# Altium PCB Edge_logic_analyzer.PcbDoc (part 3 of 3)
Units mm, origin at the board's own origin, x right, y up, seen from the top; angles counter-clockwise.
Board outline 76.03 x 55 mm, 4 copper layers (L1, L2, L3, L4), stack 1.527 mm thick; 110 components, 90 nets, 430 pads, 763 vias.
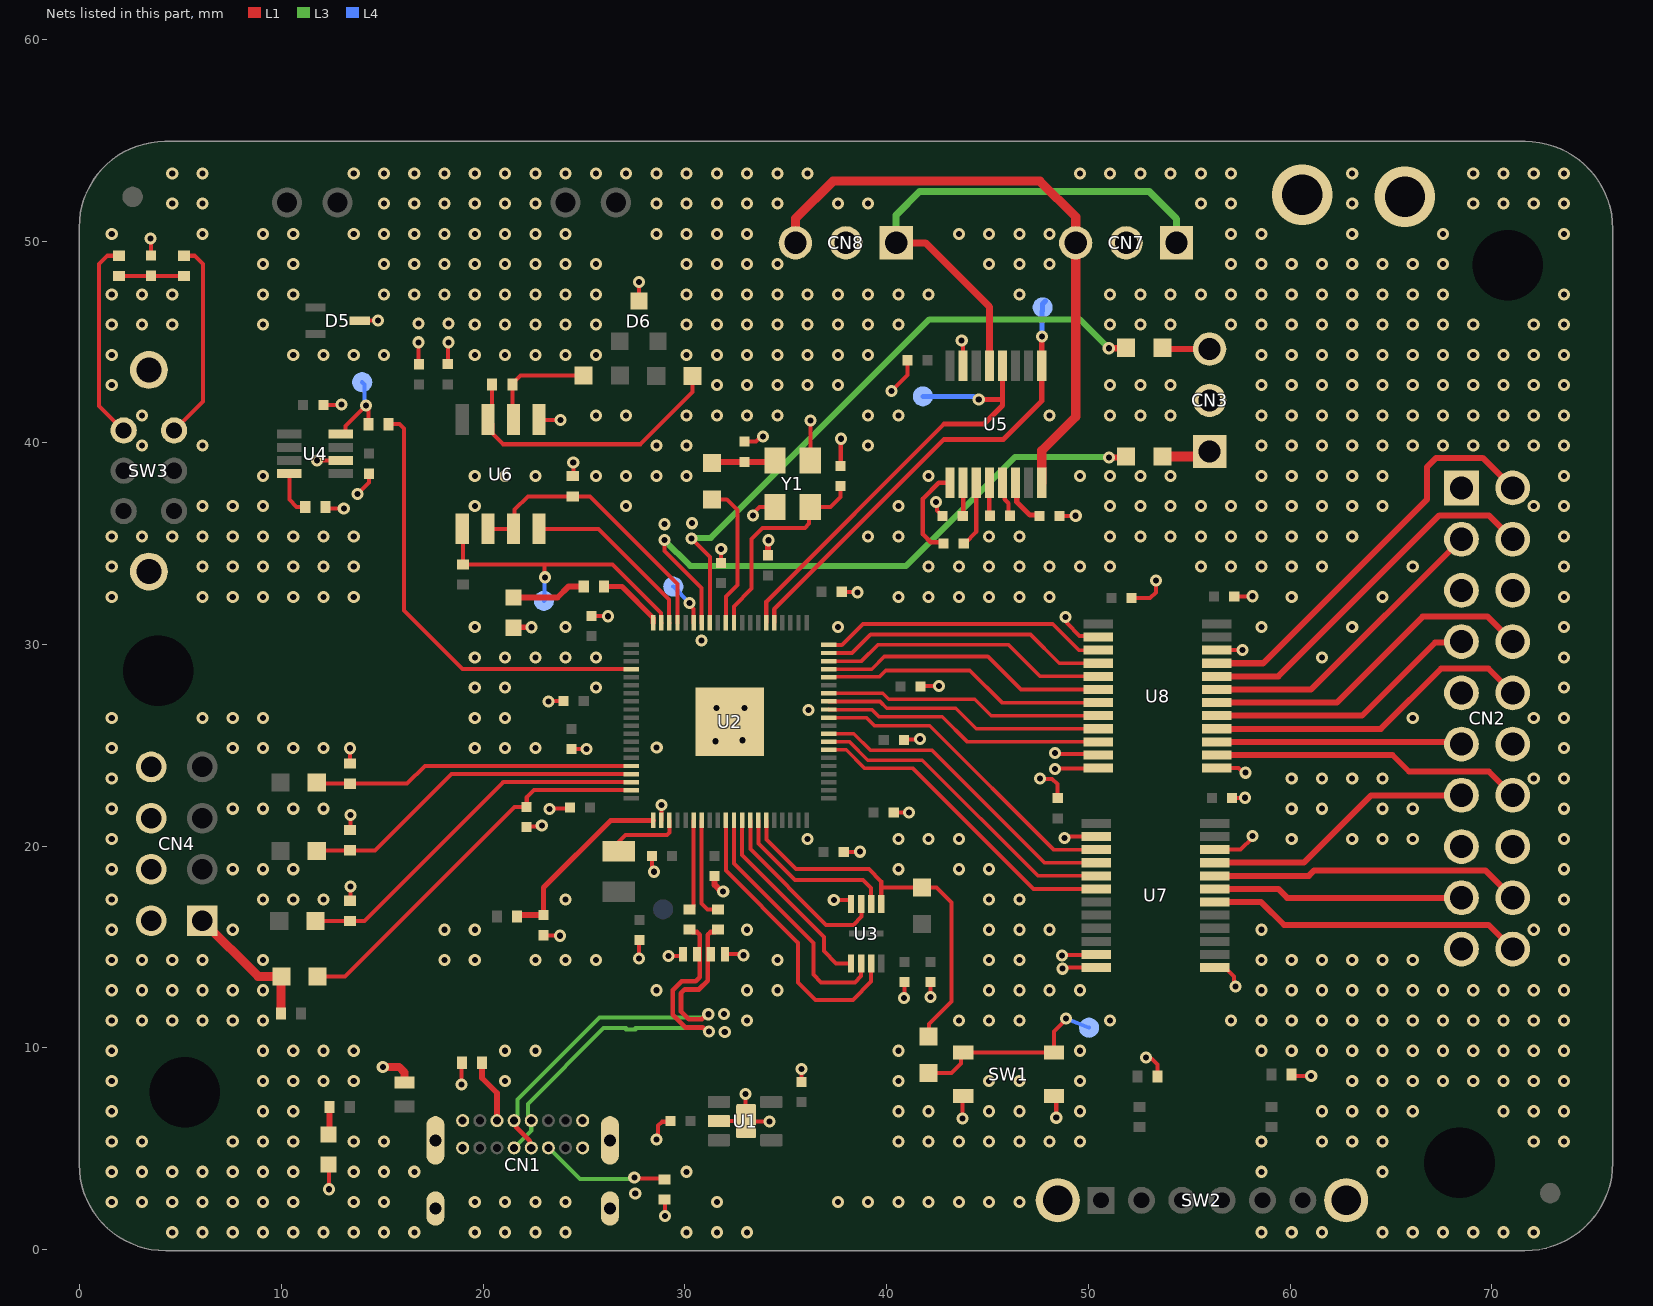
[diagram p4: the nets of this part, all layers, seen from the top]

## Via types
v1: diameter 0.6, hole 0.3, L1 to L4, tented both sides, 761 vias
v2: diameter 3, hole 2, L1 to L4, 2 vias

## Nets (pads, with @x,y where several pads share a name; then routed paths per layer and width w, separated by ;. In a path a pad name is that pad's centre, name@x,y a point inside that pad or via, vN(x,y) a via of type N, cw(c..) or ccw(c..) an arc to the next point about the centre after c; other vN are vias at no path point) (continued)
GND: C1.2 C2.2 C3.2 C4.2 C5.2 C6.1 C7.2 C8.2 C9.2 C10.1 C11.2 C12.2 C13.1 C14.1 C15.1 C16.1 C17.2 C18.1 C19.1 C20.1 C21.1 C22.2 C23.2 C24.2 C25.1 C26.1 C29.1 C30.1 C31.1 C32.1 C33.1 C34.1 C35.1 C36.1 CN1.A1 CN1.A12 CN1.B1 CN1.B12 CN1.S1 CN1.S2 CN1.S3 CN1.S4 CN2.1 CN2.5 CN2.6 CN2.9 CN2.12 CN2.15 CN2.16 CN2.19 CN3.2 CN4.2 CN4.4 CN4.6 CN4.8 CN7.2 CN8.2 D1.2 D2.1 D3.1 D4.2 D5.3 D6.3 D7.2 R1.1 R2.2 R14.1 R15.2 R23.1 R25.1 R27.1 R29.2 R32.1 SW1.1 SW1.2 SW2.7 SW2.8 SW3.MH1 SW3.MH2 U1.2 U2.62 U2.81 U3.4 U4.2 U5.15 U6.5 U7.2 U7.11 U7.12 U7.13 U7.22 U8.2 U8.11 U8.12 U8.13 U8.22 Y1.2 Y1.4 | length 81.6
  L1 w0.2: v1(3.509,50.122) 3.521,50.11 3.521,49.29 C24.2@3.534,49.278 ; v1(11.759,39.124) U4.2@12.939,39.124 ; C22.2@12.076,41.87 12.981,41.87 v1(12.981,41.894) ; R25.1@12.176,36.812 12.255,36.734 v1(13.088,36.734) ; D4.2@12.338,4.21 12.352,4.197 v1(12.352,2.99) ; R32.1@13.392,17.296 13.427,17.331 v1(13.427,18.001) ; R14.1@13.392,20.796 13.417,20.82 v1(13.417,21.535) ; R15.2@13.392,24.096 13.401,24.105 v1(13.401,24.855) ; v1(13.769,37.464) 14.337,38.032 C23.2@14.337,38.465 ; D5.3@13.878,46.049 13.885,46.056 14.784,46.056 v1(14.79,46.063) ; v1@16.751,44.987 16.782,44.957 16.782,43.922 C31.1@16.812,43.891 ; C30.1@18.245,43.896 18.265,43.916 18.265,44.961 v1(18.285,44.981) ; v1(18.922,8.183) 18.931,8.193 18.931,9.253 R2.2@18.941,9.263 ; D7.2@21.504,30.827 D7.2@21.53,30.854 ; C17.2@22.153,20.943 22.191,20.981 22.867,20.981 v1(22.905,21.02) ; U6.5@22.773,41.155 22.806,41.122 v1(23.838,41.122) ; C12.2@22.99,15.585 23.003,15.572 23.801,15.572 v1(23.814,15.558) ; v1(23.244,27.177) 23.259,27.191 23.97,27.191 C8.2@23.985,27.206 ; v1(23.295,21.835) 23.339,21.878 24.26,21.878 C9.2@24.303,21.922 ; C36.1@24.376,24.812 24.382,24.818 25.122,24.818 v1(25.127,24.823) ; R23.1@24.438,38.342 24.466,38.37 v1(24.466,39.015) ; C7.2@25.376,31.412 25.383,31.405 26.184,31.405 v1(26.191,31.399) ; D6.3@27.717,47.032 27.725,47.04 v1(27.725,47.971) ; v1(27.721,14.427) 27.73,14.437 27.73,15.435 C13.1@27.721,15.445 ; C14.1@28.365,19.519 28.365,18.945 28.47,18.84 v1(28.47,18.732) ; v1(28.598,5.466) 28.675,5.543 28.675,6.157 28.855,6.337 29.255,6.337 C1.2@29.288,6.369 ; U2.62@28.833,21.278 28.841,21.286 28.841,22.03 v1(28.849,22.038) ; R1.1@28.992,2.481 29.011,2.462 v1(29.011,1.662) ; v1(29.178,14.552) 29.802,14.552 D3.1@29.85,14.6 ; U1.2@31.683,6.371 U1.2@33.033,6.371 ; C16.1@31.796,34.048 C16.1@31.796,34.048 31.798,34.734 v1(31.8,34.736) ; D2.1@31.983,14.644 32.849,14.644 v1(32.902,14.591) ; C19.1@32.96,40.056 32.977,40.073 33.522,40.073 33.759,40.31 v1(33.867,40.31) ; v1(33.004,7.709) 33.004,6.4 U1.2@33.033,6.371 ; v1(33.379,36.391) 33.456,36.467 33.456,36.578 33.696,36.818 Y1.4@34.461,36.818 ; C6.1@34.112,34.422 C6.1@34.127,34.437 ; v1@34.127,35.151 v1(34.141,35.166) ; v1(34.202,6.344) 33.06,6.344 U1.2@33.033,6.371 ; v1(35.774,8.952) 35.775,8.951 35.775,8.313 C2.2@35.776,8.312 ; Y1.2@36.211,39.118 36.22,39.128 v1(36.22,41.098) ; v1(37.382,17.331) 38.174,17.331 38.234,17.271 U3.4@38.234,17.136 ; C18.1@37.716,38.856 37.726,38.867 37.726,40.188 v1(37.737,40.198) ; C4.2@37.776,32.612 37.789,32.599 38.547,32.599 v1(38.559,32.586) ; C10.1@37.876,19.712 37.883,19.719 38.682,19.719 v1(38.689,19.725) ; v1(40.245,42.562) 41.034,43.351 41.034,44.082 C29.1@41.027,44.089 ; C3.2@40.354,21.663 v1(41.117,21.663) ; C15.1@40.858,25.269 40.883,25.294 41.633,25.294 v1(41.658,25.319) ; v1(40.871,12.465) 40.878,12.472 40.878,13.255 C20.1@40.884,13.261 ; C5.2@41.681,27.91 41.701,27.93 42.582,27.93 v1(42.601,27.949) ; v1(42.177,12.523) 42.18,12.527 42.18,13.258 C21.1@42.184,13.261 ; v1(42.457,37.066) 42.489,37.035 42.489,36.649 C26.1@42.776,36.362 ; v1(43.724,45.062) 43.793,44.994 U5.15@43.793,43.811 ; v1(43.753,6.491) 43.753,7.571 SW1.2@43.797,7.615 ; v1(47.605,23.358) 47.626,23.337 48.205,23.337 48.463,23.079 48.463,22.405 C32.1@48.487,22.381 ; SW1.1@48.297,7.615 48.41,7.502 v1(48.41,6.537) ; v1(48.344,23.828) 48.365,23.849 50.474,23.849 U8.12@50.495,23.869 ; v1(48.351,24.616) 48.4,24.568 50.446,24.568 U8.11@50.495,24.519 ; C25.1@48.576,36.362 48.585,36.371 49.367,36.371 v1(49.376,36.38) ; v1(48.694,14.572) 48.723,14.601 50.366,14.601 U7.11@50.395,14.629 ; v1(48.718,13.925) 48.772,13.979 U7.12@50.395,13.979 ; v1(48.825,20.401) 48.934,20.401 49.012,20.479 U7.2@50.395,20.479 ; v1(48.861,31.354) 48.938,31.277 48.938,31.064 49.574,30.427 50.437,30.427 U8.2@50.495,30.369 ; C35.1@52.147,32.295 53.066,32.295 53.349,32.579 53.349,33.173 v1(53.355,33.179) ; v1(52.853,9.523) 52.93,9.446 53.158,9.446 53.433,9.171 R29.2@53.433,8.571 ; U7.13@56.271,13.979 56.783,13.979 57.223,13.54 57.223,13.126 v1(57.299,13.05) ; U7.22@56.271,19.829 57.55,19.829 58.135,20.414 v1(58.135,20.498) ; U8.13@56.371,23.869 57.457,23.869 57.684,23.642 v1(57.792,23.642) ; U8.22@56.371,29.719 U8.22@56.371,29.719 57.652,29.718 v1(57.654,29.716) ; C33.1@57.126,22.393 57.129,22.397 57.772,22.397 v1(57.776,22.401) ; C34.1@57.234,32.388 57.235,32.389 v1@58.132,32.389 ; R27.1@60.083,8.671 60.155,8.599 v1(61.051,8.599) ; v1@58.132,32.389 v1(58.133,32.389)
  L1 w0.254: D7.2@21.53,30.854 v1(22.391,30.854)
  L1 w0.3: C11.2@31.476,18.512 31.476,18.079 31.807,17.749 v1(31.899,17.749) ; C6.1@34.127,34.437 v1@34.127,35.151
  L1 w0.4: v1(15.023,9.043) 15.835,9.043 16.098,8.78 D1.2@16.098,8.287
  other v1: 4.584,0.857 6.084,0.857 7.584,0.857 9.084,0.857 10.584,0.857 12.084,0.857 13.584,0.857 15.084,0.857 16.584,0.857 19.584,0.857 21.084,0.857 22.584,0.857 24.084,0.857 30.084,0.857 31.584,0.857 33.084,0.857 58.584,0.857 60.084,0.857 61.584,0.857 64.584,0.857 66.084,0.857 67.584,0.857 69.084,0.857 70.584,0.857 72.084,0.857 1.584,2.357 3.084,2.357 4.584,2.357 6.084,2.357 7.584,2.357 9.084,2.357 10.584,2.357 13.584,2.357 15.084,2.357 19.584,2.357 21.084,2.357 22.584,2.357 24.084,2.357 31.584,2.357 37.584,2.357 39.084,2.357 40.584,2.357 42.084,2.357 43.584,2.357 45.084,2.357 46.584,2.357 27.537,2.783 1.584,3.857 3.084,3.857 4.584,3.857 6.084,3.857 7.584,3.857 9.084,3.857 10.584,3.857 13.584,3.857 15.084,3.857 16.584,3.857 30.084,3.857 58.584,3.857 64.584,3.857 1.584,5.357 3.084,5.357 7.584,5.357 9.084,5.357 10.584,5.357 13.584,5.357 15.084,5.357 40.584,5.357 42.084,5.357 43.584,5.357 45.084,5.357 46.584,5.357 48.084,5.357 49.584,5.357 58.584,5.357 61.584,5.357 63.084,5.357 64.584,5.357 72.084,5.357 73.584,5.357 1.584,6.857 9.084,6.857 10.584,6.857 40.584,6.857 42.084,6.857 45.084,6.857 46.584,6.857 49.584,6.857 61.584,6.857 63.084,6.857 64.584,6.857 66.084,6.857 70.584,6.857 72.084,6.857 73.584,6.857 1.584,8.357 9.084,8.357 10.584,8.357 12.084,8.357 13.584,8.357 21.084,8.357 40.584,8.357 45.084,8.357 46.584,8.357 49.584,8.357 63.084,8.357 64.584,8.357 66.084,8.357 67.584,8.357 69.084,8.357 70.584,8.357 72.084,8.357 73.584,8.357 1.584,9.857 9.084,9.857 10.584,9.857 12.084,9.857 13.584,9.857 21.084,9.857 22.584,9.857 40.584,9.857 49.584,9.857 58.584,9.857 60.084,9.857 61.584,9.857 63.084,9.857 64.584,9.857 66.084,9.857 67.584,9.857 69.084,9.857 70.584,9.857 72.084,9.857 73.584,9.857 31.974,10.793 1.584,11.357 3.084,11.357 4.584,11.357 6.084,11.357 7.584,11.357 9.084,11.357 33.084,11.357 43.584,11.357 45.084,11.357 46.584,11.357 51.084,11.357 57.084,11.357 58.584,11.357 60.084,11.357 61.584,11.357 63.084,11.357 64.584,11.357 66.084,11.357 67.584,11.357 69.084,11.357 70.584,11.357 72.084,11.357 73.584,11.357 31.934,11.675 1.584,12.857 3.084,12.857 4.584,12.857 6.084,12.857 7.584,12.857 9.084,12.857 28.584,12.857 33.084,12.857 34.584,12.857 45.084,12.857 46.584,12.857 48.084,12.857 49.584,12.857 58.584,12.857 60.084,12.857 61.584,12.857 63.084,12.857 64.584,12.857 66.084,12.857 67.584,12.857 69.084,12.857 70.584,12.857 72.084,12.857 73.584,12.857 1.584,14.357 3.084,14.357 4.584,14.357 6.084,14.357 9.084,14.357 18.084,14.357 19.584,14.357 22.584,14.357 24.084,14.357 25.584,14.357 34.584,14.357 45.084,14.357 46.584,14.357 58.584,14.357 60.084,14.357 61.584,14.357 63.084,14.357 64.584,14.357 66.084,14.357 73.584,14.357 1.584,15.857 7.584,15.857 18.084,15.857 19.584,15.857 33.084,15.857 45.084,15.857 46.584,15.857 48.084,15.857 58.584,15.857 72.084,15.857 73.584,15.857 1.584,17.357 9.084,17.357 10.584,17.357 12.084,17.357 24.084,17.357 45.084,17.357 46.584,17.357 73.584,17.357 1.584,18.857 7.584,18.857 9.084,18.857 10.584,18.857 40.584,18.857 43.584,18.857 45.084,18.857 73.584,18.857 1.584,20.357 36.084,20.357 40.584,20.357 42.084,20.357 43.584,20.357 60.084,20.357 63.084,20.357 64.584,20.357 66.084,20.357 73.584,20.357 1.584,21.857 7.584,21.857 9.084,21.857 10.584,21.857 12.084,21.857 60.084,21.857 61.584,21.857 64.584,21.857 66.084,21.857 73.584,21.857 1.584,23.357 60.084,23.357 61.584,23.357 63.084,23.357 64.584,23.357 72.084,23.357 73.584,23.357 1.584,24.857 7.584,24.857 9.084,24.857 10.584,24.857 12.084,24.857 19.584,24.857 21.084,24.857 22.584,24.857 73.584,24.857 28.603,24.887 31.521,25.203 32.852,25.251 1.584,26.357 6.084,26.357 7.584,26.357 9.084,26.357 19.584,26.357 21.084,26.357 66.084,26.357 72.084,26.357 73.584,26.357 36.122,26.752 31.568,26.839 32.954,26.839 19.584,27.857 21.084,27.857 25.584,27.857 73.584,27.857 19.584,29.357 21.084,29.357 22.584,29.357 24.084,29.357 25.584,29.357 61.584,29.357 73.584,29.357 30.823,30.198 19.584,30.857 24.084,30.857 37.584,30.857 58.584,30.857 63.084,30.857 73.584,30.857 1.584,32.357 6.084,32.357 7.584,32.357 9.084,32.357 10.584,32.357 12.084,32.357 13.584,32.357 40.584,32.357 42.084,32.357 43.584,32.357 45.084,32.357 46.584,32.357 48.084,32.357 60.084,32.357 64.584,32.357 73.584,32.357 1.584,33.857 6.084,33.857 7.584,33.857 9.084,33.857 10.584,33.857 12.084,33.857 13.584,33.857 42.084,33.857 43.584,33.857 45.084,33.857 46.584,33.857 48.084,33.857 49.584,33.857 51.084,33.857 55.584,33.857 57.084,33.857 58.584,33.857 60.084,33.857 61.584,33.857 66.084,33.857 73.584,33.857 1.584,35.357 3.084,35.357 4.584,35.357 6.084,35.357 7.584,35.357 9.084,35.357 10.584,35.357 12.084,35.357 13.584,35.357 39.084,35.357 40.584,35.357 45.084,35.357 46.584,35.357 51.084,35.357 52.584,35.357 54.084,35.357 55.584,35.357 57.084,35.357 58.584,35.357 60.084,35.357 61.584,35.357 63.084,35.357 73.584,35.357 28.992,35.961 30.354,36.011 6.084,36.857 7.584,36.857 9.084,36.857 19.584,36.857 27.084,36.857 40.584,36.857 51.084,36.857 52.584,36.857 54.084,36.857 55.584,36.857 57.084,36.857 58.584,36.857 60.084,36.857 61.584,36.857 63.084,36.857 64.584,36.857 72.084,36.857 73.584,36.857 9.084,38.357 19.584,38.357 21.084,38.357 22.584,38.357 25.584,38.357 27.084,38.357 28.584,38.357 30.084,38.357 42.084,38.357 49.584,38.357 51.084,38.357 52.584,38.357 54.084,38.357 58.584,38.357 60.084,38.357 61.584,38.357 63.084,38.357 64.584,38.357 73.584,38.357 3.084,39.857 6.084,39.857 28.584,39.857 30.084,39.857 39.084,39.857 58.584,39.857 60.084,39.857 61.584,39.857 63.084,39.857 64.584,39.857 66.084,39.857 67.584,39.857 69.084,39.857 70.584,39.857 72.084,39.857 73.584,39.857 3.084,41.357 25.584,41.357 27.084,41.357 30.084,41.357 31.584,41.357 33.084,41.357 34.584,41.357 39.084,41.357 40.584,41.357 48.084,41.357 51.084,41.357 52.584,41.357 54.084,41.357 58.584,41.357 60.084,41.357 61.584,41.357 63.084,41.357 64.584,41.357 66.084,41.357 67.584,41.357 69.084,41.357 70.584,41.357 72.084,41.357 73.584,41.357 1.584,42.857 31.584,42.857 33.084,42.857 34.584,42.857 36.084,42.857 37.584,42.857 51.084,42.857 52.584,42.857 54.084,42.857 58.584,42.857 60.084,42.857 61.584,42.857 63.084,42.857 64.584,42.857 66.084,42.857 67.584,42.857 69.084,42.857 70.584,42.857 72.084,42.857 73.584,42.857 1.584,44.357 10.584,44.357 12.084,44.357 13.584,44.357 15.084,44.357 19.584,44.357 21.084,44.357 22.584,44.357 24.084,44.357 25.584,44.357 30.084,44.357 31.584,44.357 33.084,44.357 34.584,44.357 36.084,44.357 37.584,44.357 39.084,44.357 58.584,44.357 60.084,44.357 61.584,44.357 63.084,44.357 64.584,44.357 66.084,44.357 67.584,44.357 69.084,44.357 70.584,44.357 72.084,44.357 73.584,44.357 16.801,44.981 1.584,45.857 3.084,45.857 4.584,45.857 9.084,45.857 19.584,45.857 21.084,45.857 22.584,45.857 24.084,45.857 25.584,45.857 30.084,45.857 31.584,45.857 33.084,45.857 34.584,45.857 36.084,45.857 37.584,45.857 39.084,45.857 40.584,45.857 51.084,45.857 52.584,45.857 54.084,45.857 57.084,45.857 58.584,45.857 60.084,45.857 61.584,45.857 63.084,45.857 64.584,45.857 66.084,45.857 67.584,45.857 69.084,45.857 72.084,45.857 73.584,45.857 16.801,45.921 18.285,45.921 1.584,47.357 3.084,47.357 4.584,47.357 9.084,47.357 10.584,47.357 15.084,47.357 16.584,47.357 18.084,47.357 19.584,47.357 21.084,47.357 22.584,47.357 24.084,47.357 25.584,47.357 30.084,47.357 31.584,47.357 33.084,47.357 34.584,47.357 36.084,47.357 37.584,47.357 39.084,47.357 40.584,47.357 42.084,47.357 46.584,47.357 51.084,47.357 52.584,47.357 54.084,47.357 55.584,47.357 57.084,47.357 58.584,47.357 60.084,47.357 61.584,47.357 63.084,47.357 64.584,47.357 66.084,47.357 67.584,47.357 73.584,47.357 9.084,48.857 10.584,48.857 15.084,48.857 16.584,48.857 18.084,48.857 19.584,48.857 21.084,48.857 22.584,48.857 24.084,48.857 25.584,48.857 30.084,48.857 31.584,48.857 33.084,48.857 34.584,48.857 45.084,48.857 46.584,48.857 48.084,48.857 57.084,48.857 58.584,48.857 60.084,48.857 61.584,48.857 63.084,48.857 64.584,48.857 66.084,48.857 67.584,48.857 1.584,50.357 6.084,50.357 9.084,50.357 10.584,50.357 13.584,50.357 15.084,50.357 16.584,50.357 18.084,50.357 19.584,50.357 21.084,50.357 22.584,50.357 24.084,50.357 28.584,50.357 30.084,50.357 31.584,50.357 33.084,50.357 43.584,50.357 45.084,50.357 46.584,50.357 48.084,50.357 57.084,50.357 58.584,50.357 63.084,50.357 67.584,50.357 73.584,50.357 4.584,51.857 6.084,51.857 15.084,51.857 16.584,51.857 18.084,51.857 19.584,51.857 21.084,51.857 22.584,51.857 28.584,51.857 30.084,51.857 31.584,51.857 33.084,51.857 34.584,51.857 37.584,51.857 39.084,51.857 55.584,51.857 57.084,51.857 63.084,51.857 69.084,51.857 70.584,51.857 72.084,51.857 73.584,51.857 4.584,53.357 6.084,53.357 13.584,53.357 15.084,53.357 16.584,53.357 18.084,53.357 19.584,53.357 21.084,53.357 22.584,53.357 24.084,53.357 25.584,53.357 27.084,53.357 28.584,53.357 30.084,53.357 31.584,53.357 33.084,53.357 34.584,53.357 36.084,53.357 49.584,53.357 51.084,53.357 52.584,53.357 54.084,53.357 55.584,53.357 57.084,53.357 63.084,53.357 69.084,53.357 70.584,53.357 72.084,53.357 73.584,53.357
  other v2: 65.7,52.2 60.6,52.3
NetC12_1: C12.1 R6.1 U2.61 | length 9.6
  L1 w0.254: C12.1@22.99,16.585 22.99,17.95 26.318,21.278 U2.61@28.433,21.278
  L1 w0.3: R6.1@21.677,16.522 21.677,16.479 21.686,16.47 21.686,16.494 21.777,16.585 C12.1@22.99,16.585
NetC17_1: C17.1 R7.1 U2.59 | length 19.6
  L1 w0.2: R7.1@11.793,13.543 13.151,13.543 21.551,21.943 C17.1@22.153,21.943 22.159,21.949 22.159,22.425 22.509,22.775 U2.59@27.337,22.775
NetC18_2: C18.2 U2.30 Y1.1 | length 10.7
  L1 w0.2: U2.30@32.433,31.071 32.433,31.889 33.313,32.769 33.313,35.234 33.854,35.775 35.946,35.775 36.156,35.986 Y1.1@36.156,36.764 ; Y1.1@36.211,36.818 37.225,36.818 37.716,37.309 C18.2@37.716,37.856
NetC19_2: C19.2 R30.1 Y1.3 | length 3.2
  L1 w0.3: R30.1@31.35,38.991 31.415,39.056 C19.2@32.96,39.056 34.398,39.056 Y1.3@34.461,39.118
NetC24_1: C24.1 R16.1 R17.2 | length 3.2
  L1 w0.2: R16.1@1.939,48.272 1.939,48.278 C24.1@3.534,48.278 3.534,48.272 R17.2@5.16,48.272
NetC25_2: C25.2 U5.6 | length 2.4
  L1 w0.254: U5.6@46.393,38.011 46.452,37.952 46.452,37.065 47.1,36.417 47.522,36.417 C25.2@47.576,36.362
NetC26_2: C26.2 U5.2 | length 1.6
  L1 w0.18: C26.2@43.769,36.37 C26.2@43.776,36.362 ; U5.2@43.793,38.011 U5.2@43.8,38.004
  L1 w0.22: C26.2@43.8,36.377 U5.2@43.8,38.004
NetC27_1: C27.1 U5.5 | length 1.7
  L1 w0.22: U5.5@45.743,38.011 45.858,37.896 45.858,37.19 46.044,37.003 46.044,36.508 C27.1@46.083,36.469
NetC27_2: C27.2 U5.4 | length 1.5
  L1 w0.22: C27.2@45.083,36.469 U5.4@45.083,38.002
NetC28_1: C28.1 U5.3 | length 3.2
  L1 w0.2: C28.1@43.876,35.012 44.443,35.578
  L1 w0.22: 44.443,35.578 U5.3@44.443,38.011
NetC28_2: C28.2 U5.1 | length 4.5
  L1 w0.22: C28.2@42.681,35.074 42.192,35.074 41.8,35.466 41.8,37.225 42.587,38.011 U5.1@43.143,38.011
NetCN1_A5: CN1.A5 R2.1 | length 3.2
  L1 w0.3: R2.1@19.941,9.263 19.941,8.506 20.683,7.764 CN1.A5@20.683,6.394
NetCN1_B5: CN1.B5 R1.2 | length 6.2
  L1 w0.2: v1(27.491,3.569) 27.535,3.525 28.948,3.525 R1.2@28.992,3.481
  L3 w0.2: CN1.B5@23.233,5.044 23.256,5.044 24.8,3.5 v1@27.3,3.5
NetCN2_2: CN2.2 U8.21 | length 20.4
  L1 w0.3: U8.21@56.371,29.069 58.669,29.069 66.8,37.2 66.8,38.8 67.246,39.246 69.554,39.246 CN2.2@71.04,37.76
NetCN2_3: CN2.3 U8.19 | length 15.2
  L1 w0.3: U8.19@56.371,27.769 61.049,27.769 CN2.3@68.5,35.22
NetCN2_4: CN2.4 U8.20 | length 18.5
  L1 w0.3: U8.20@56.371,28.419 59.419,28.419 67.4,36.4 69.86,36.4 CN2.4@71.04,35.22
NetCN2_7: CN2.7 U8.17 | length 13.6
  L1 w0.3: U8.17@56.371,26.469 63.569,26.469 67.188,30.088 68.448,30.088 CN2.7@68.5,30.14
NetCN2_8: CN2.8 U8.18 | length 16.9
  L1 w0.3: U8.18@56.371,27.119 62.32,27.119 66.581,31.38 69.8,31.38 CN2.8@71.04,30.14
NetCN2_10: CN2.10 U8.16 | length 16.5
  L1 w0.3: U8.16@56.371,25.819 64.503,25.819 67.484,28.8 69.84,28.8 70.8,27.84 70.8,27.6 CN2.10@71.04,27.6
NetCN2_11: CN2.11 U8.15 | length 12.2
  L1 w0.3: U8.15@56.371,25.169 68.391,25.169 CN2.11@68.5,25.06
NetCN2_13: CN2.13 U7.21 | length 13.6
  L1 w0.3: U7.21@56.271,19.179 60.679,19.179 64.02,22.52 CN2.13@68.5,22.52
NetCN2_14: CN2.14 U8.14 | length 15.5
  L1 w0.3: U8.14@56.371,24.519 65.081,24.519 65.9,23.7 69.86,23.7 CN2.14@71.04,22.52
NetCN2_17: CN2.17 U7.19 | length 12.4
  L1 w0.3: U7.19@56.271,17.879 59.421,17.879 59.86,17.44 CN2.17@68.5,17.44
NetCN2_18: CN2.18 U7.20 | length 15.4
  L1 w0.3: U7.20@56.271,18.529 60.929,18.529 61.2,18.8 69.68,18.8 CN2.18@71.04,17.44
NetCN2_20: CN2.20 U7.18 | length 15.7
  L1 w0.3: U7.18@56.271,17.229 58.571,17.229 59.7,16.1 69.84,16.1 CN2.20@71.04,14.9
NetCN3_1: CN3.1 R10.2 | length 2.1
  L1 w0.5: R10.2@53.876,39.312 CN3.1@56.004,39.312
NetCN3_3: CN3.3 R11.2 | length 2.2
  L1 w0.3: R11.2@53.876,44.712 53.946,44.642 CN3.3@56.014,44.642
NetCN4_1: CN4.1 R7.2 R8.1 | length 6.9
  L1 w0.45: CN4.1@6.076,16.307 8.84,13.543 R7.2@9.976,13.543 ; R8.1@9.976,11.712 R7.2@9.976,13.543 ; R7.2@9.993,13.543 R7.2@9.976,13.543
NetD4_1: D4.1 R3.1 | length 1.4
  L1 w0.3: D4.1@12.338,5.71 12.383,5.755 R3.1@12.383,7.071
NetD7_1: D7.1 R34.2 | length 3.7
  L1 w0.3: D7.1@21.504,32.327 23.686,32.327 24.233,32.875 R34.2@24.984,32.875
NetL1_2: L1.2 U2.63 | length 4
  L1 w0.2: L1.2@26.704,19.499 26.704,20.199 27.057,20.552 29.116,20.552 29.233,20.669 U2.63@29.233,21.278
NetR4_1: R4.1 U2.67 | length 5
  L1 w0.2: U2.67@30.833,21.278 30.833,17.147 31.111,16.869 R4.1@31.633,16.869
NetR5_1: R5.1 U2.66 | length 4.5
  L1 w0.2: R5.1@30.233,16.869 30.283,16.869 30.433,17.019 30.433,17.136 U2.66@30.433,21.278
NetR9_1: R9.1 SW1.3 SW1.4 TP3.1 | length 10
  L1 w0.2: R9.1@42.074,8.759 43.213,8.759 43.685,9.232 43.685,9.653 SW1.4@43.797,9.765 SW1.3@48.297,9.765 48.297,10.82 v1@48.889,11.412
  L4 w0.2: v1(48.901,11.453) TP3.1@50.034,11
NetR10_1: R10.1 U2.34 | length 30.8
  L1 w0.2: v1(28.984,35.169) 28.984,34.64 30.833,32.791 U2.34@30.833,31.071
  L1 w0.3: v1(51.034,39.269) 52.034,39.269 R10.1@52.076,39.312
  L3 w0.3: v1(28.984,35.169) 30.255,33.898 40.969,33.898 46.372,39.302 51.002,39.302 v1(51.034,39.269) v1@51.034,39.265
NetR11_1: R11.1 U2.33 | length 31.4
  L1 w0.2: v1(30.326,35.245) 31.233,34.338 U2.33@31.233,31.071
  L1 w0.3: v1(51.015,44.686) 52.05,44.686 R11.1@52.076,44.712
  L3 w0.3: v1@30.307,35.245 30.346,35.283 31.285,35.283 42.123,46.122 49.579,46.122 v1(51.015,44.686)
NetR12_1: R12.1 R14.2 U2.57 | length 17.2
  L1 w0.2: R12.1@11.748,19.76 11.783,19.796 R14.2@13.392,19.796 14.646,19.796 18.426,23.575 U2.57@27.337,23.575
NetR13_1: R13.1 R15.1 U2.56 | length 16
  L1 w0.2: R13.1@11.748,23.16 11.812,23.096 R15.1@13.392,23.096 16.233,23.096 17.112,23.975 U2.56@27.337,23.975
NetR16_2: R16.2 SW3.4 | length 9.9
  L1 w0.2: R16.2@1.939,49.272 1.37,49.272 0.962,48.863 0.962,41.827 SW3.4@2.176,40.612
NetR17_1: R17.1 SW3.1 | length 9.9
  L1 w0.2: SW3.1@4.676,40.612 6.101,42.036 6.101,48.861 5.69,49.272 R17.1@5.16,49.272
NetR18_1: R18.1 U2.44 | length 22.3
  L1 w0.2: R18.1@15.309,40.919 15.859,40.919 16.07,40.709 16.07,31.677 18.972,28.775 U2.44@27.337,28.775
NetR18_2: R18.2 TP5.1 U4.4 | length 3.7
  L1 w0.2: U4.4@13.173,40.549 13.173,40.832 v1@14.11,41.769 ; v1@14.186,41.737 14.309,41.614 R18.2@14.309,40.919
  L4 w0.2: TP5.1@14,43 14.11,42.89 14.11,41.922 v1(14.186,41.845)
NetR20_1: R20.1 R24.2 U6.7 | length 14.6
  L1 w0.2: R24.2@20.446,42.883 20.446,41.368 U6.7@20.233,41.155 20.458,40.93 20.458,40.449 20.981,39.926 27.792,39.926 30.381,42.515 R20.1@30.381,43.313
NetR21_1: R21.1 R24.1 U6.6 | length 5.5
  L1 w0.2: U6.6@21.503,41.155 21.446,41.213 R24.1@21.446,42.883 21.446,42.933 21.839,43.326 R21.1@24.978,43.326
NetR22_1: R22.1 TP4.1 U2.39 U6.1 | length 15
  L1 w0.2: U6.1@18.963,35.733 18.991,35.705 R22.1@18.991,33.965 23.043,33.965 ; v1@23.043,33.289 23.043,33.965 ; U2.39@28.833,31.071 28.823,31.081 28.823,31.549 26.407,33.965 23.043,33.965
  L4 w0.2: TP4.1@23.012,32.162 23.034,32.183 23.034,33.309 v1(23.055,33.33)
NetR23_2: R23.2 U2.37 U6.2 U6.3 | length 14.3
  L1 w0.2: U6.2@20.233,35.733 U6.3@21.503,35.733 21.562,35.792 21.562,36.68 22.224,37.342 R23.2@24.438,37.342 25.296,37.342 29.633,33.005 U2.37@29.633,31.071
NetR25_2: R25.2 U4.8 | length 2.2
  L1 w0.2: U4.8@10.389,38.474 10.389,37.176 10.744,36.822 11.166,36.822 R25.2@11.176,36.812
NetR30_2: R30.2 U2.31 | length 7.3
  L1 w0.2: R30.2@31.35,37.191 32.075,37.191 32.612,36.654 32.612,32.957 32.033,32.378 U2.31@32.033,31.071
NetR31_1: R31.1 R32.2 U2.58 | length 18.5
  L1 w0.2: R31.1@11.692,16.296 R32.2@13.392,16.296 14.116,16.296 20.995,23.175 U2.58@27.337,23.175
NetR34_1: R34.1 U2.40 | length 3.3
  L1 w0.254: R34.1@25.984,32.875 26.875,32.875 28.433,31.317 U2.40@28.433,31.071
NetTP2_1: TP2.1 U2.35 | length 2.2
  L1 w0.2: v1(30.231,32.061) 30.231,31.96 30.433,31.759 U2.35@30.433,31.071
  L4 w0.2: TP2.1@29.423,32.869 v1(30.231,32.061)
NetTP6_1: TP6.1 U2.26 U5.12 | length 22.7
  L1 w0.22: U2.26@34.033,31.071 34.033,32.109 42.849,40.925
  L1 w0.254: 42.849,40.925 44.827,40.925 45.743,41.841 45.743,42.141 ; v1@44.6,42.141 45.743,42.141 ; U5.12@45.743,43.811 45.743,42.141
  L4 w0.254: TP6.1@41.8,42.3 44.314,42.3 44.475,42.139 v1(44.568,42.139)
NetTP7_1: TP7.1 U2.25 U5.9 | length 23.2
  L1 w0.22: U2.25@34.433,31.071 34.433,31.755 42.84,40.161
  L1 w0.254: 42.84,40.161 45.783,40.161 47.693,42.072 U5.9@47.693,43.811 v1@47.693,45.229
  L4 w0.254: v1(47.705,45.27) 47.705,46.504 47.735,46.535 TP7.1@47.735,46.709 47.735,46.883 TP7.1@47.878,47.026
NetU2_7: U2.7 U7.6 | length 16.1
  L1 w0.18: U2.7@37.13,24.775 37.993,24.775 38.899,23.87 41.287,23.87 47.278,17.879 U7.6@50.395,17.879
NetU2_8: U2.8 U7.5 | length 16
  L1 w0.18: U2.8@37.13,25.175 38.159,25.175 39.072,24.262 41.771,24.262 47.504,18.529 U7.5@50.395,18.529
NetU2_9: U2.9 U7.4 | length 15.9
  L1 w0.18: U2.9@37.13,25.575 38.372,25.575 39.198,24.749 42.254,24.749 47.824,19.179 U7.4@50.395,19.179
NetU2_11: U2.11 U7.3 | length 16
  L1 w0.18: U2.11@37.13,26.375 38.988,26.375 39.399,25.965 42.134,25.965 48.269,19.829 U7.3@50.395,19.829
NetU2_12: U2.12 U8.10 | length 14
  L1 w0.18: U2.12@37.13,26.775 37.15,26.755 39.283,26.755 39.622,26.416 42.761,26.416 44.008,25.169 U8.10@50.495,25.169
NetU2_13: U2.13 U8.9 | length 13.9
  L1 w0.18: U2.13@37.13,27.175 39.671,27.175 40.009,26.837 43.423,26.837 44.442,25.819 U8.9@50.495,25.819
NetU2_14: U2.14 U8.8 | length 13.8
  L1 w0.18: U2.14@37.13,27.575 39.813,27.575 40.1,27.289 44.368,27.289 45.188,26.469 U8.8@50.495,26.469
NetU2_16: U2.16 U8.7 | length 14.2
  L1 w0.18: U2.16@37.13,28.375 37.15,28.395 37.522,28.395 37.532,28.405 39.651,28.405 39.954,28.708 44.127,28.708 45.716,27.119 U8.7@50.495,27.119
NetU2_17: U2.17 U8.6 | length 14.3
  L1 w0.18: U2.17@37.13,28.775 39.26,28.775 39.889,29.405 45.022,29.405 46.658,27.769 U8.6@50.495,27.769
NetU2_18: U2.18 U8.5 | length 14.3
  L1 w0.18: U2.18@37.13,29.175 38.755,29.175 39.558,29.978 46.049,29.978 47.608,28.419 U8.5@50.495,28.419
NetU2_19: U2.19 U8.4 | length 14.3
  L1 w0.18: U2.19@37.13,29.575 38.288,29.575 39.206,30.493 47.134,30.493 48.558,29.069 U8.4@50.495,29.069
NetU2_20: U2.20 U8.3 | length 14.3
  L1 w0.18: U2.20@37.13,29.975 37.785,29.975 38.825,31.015 48.242,31.015 49.538,29.719 U8.3@50.495,29.719
NetU2_38: U2.38 U6.4 | length 9.1
  L1 w0.2: U6.4@22.773,35.733 25.721,35.733 29.223,32.231 29.223,31.081 U2.38@29.233,31.071
NetU2_70: U2.70 U3.7 | length 14.8
  L1 w0.2: U2.70@32.033,21.278 32.033,18.787 35.608,15.211 35.608,13.251 36.477,12.382 38.327,12.382 39.234,13.289 U3.7@39.234,14.186
NetU2_71: U2.71 U3.6 | length 12.6
  L1 w0.2: U2.71@32.433,21.278 32.433,19.136 36.373,15.196 36.373,13.627 36.758,13.242 38.423,13.242 38.734,13.553 U3.6@38.734,14.186
NetU2_72: U2.72 U3.5 | length 9.8
  L1 w0.2: U2.72@32.833,21.278 32.838,21.274 32.838,19.553 36.89,15.5 36.89,14.794 37.498,14.186 U3.5@38.234,14.186
NetU2_73: U2.73 U3.3 | length 9.3
  L1 w0.2: U2.73@33.233,21.278 33.243,21.268 33.243,19.862 37.004,16.101 38.35,16.101 38.752,16.504 38.752,17.118 U3.3@38.734,17.136
NetU2_74: U2.74 U3.2 | length 8.4
  L1 w0.2: U2.74@33.633,21.278 33.643,21.268 33.643,20.129 35.459,18.314 38.835,18.314 39.234,17.915 U3.2@39.234,17.136
QSPI_SS: R9.2 R33.1 U2.75 U3.1 | length 19.5
  L1 w0.2: U2.75@34.033,21.278 34.043,21.268 34.043,20.323 35.503,18.863 39.116,18.863 39.734,18.245 39.734,17.981 ; U3.1@39.734,17.136 39.734,17.981 ; R9.2@42.074,10.559 42.099,10.584 42.099,11.192 43.213,12.306 43.213,17.199 42.462,17.949 R33.1@41.758,17.949 39.766,17.949 39.734,17.981
TX1: CN7.3 CN8.3 U5.8 | length 30.5
  L1 w0.45: CN8.3@35.476,49.912 35.493,49.929 35.493,51.125 37.344,52.975 47.601,52.975 49.376,51.199 CN7.3@49.376,49.912 49.376,41.289 47.693,39.606 U5.8@47.693,38.011
TX2: CN7.1 CN8.1 U5.13 | length 26.4
  L1 w0.35: CN8.1@40.476,49.912 41.921,49.912 45.093,46.74 U5.13@45.093,43.811
  L3 w0.35: CN8.1@40.476,49.912 40.476,51.296 41.637,52.457 53.022,52.457 54.376,51.102 CN7.1@54.376,49.912
USB_N: CN1.A7 CN1.B7 D3.2 R5.2 | length 21
  L1 w0.24: R5.2@30.233,15.869 30.363,15.739 30.592,15.739 30.733,15.599 30.733,13.5 30.533,13.3 29.834,13.3 29.4,12.866 29.4,11.641 30.025,11.016 30.877,11.016 31.089,10.804 v1(31.186,10.804)
  L3 w0.2: CN1.B7@21.533,5.044 22.383,5.894 CN1.A7@22.383,6.394 22.383,6.516 22.218,6.681 22.218,7.218 25.975,10.975 26.536,10.975 27.09,10.975 27.09,10.908 27.544,10.908 27.544,10.975 27.804,10.975 30.907,10.975 31.078,10.804 v1(31.186,10.804)
USB_P: CN1.A6 CN1.B6 D2.2 R4.2 | length 21
  L1 w0.24: CN1.A6@21.533,6.394 21.611,6.316 21.611,6.089 22.304,5.396 22.304,5.123 CN1.B6@22.383,5.044 ; v1(31.16,11.666) 31.09,11.666 30.839,11.416 30.191,11.416 29.8,11.807 29.8,12.7 30,12.9 30.698,12.9 31.133,13.334 31.133,15.599 31.273,15.739 31.503,15.739 R4.2@31.633,15.869
  L3 w0.2: CN1.A6@21.533,6.394 21.533,6.516 21.698,6.681 21.698,7.433 25.76,11.495 30.881,11.495 31.052,11.666 v1(31.16,11.666)
pads on no net: CN1.A8 CN1.B8 FID1. FID2. MH1. MH2. MH3. MH4. SW3.3 SW3.6 U1.4 U2.1 U2.2 U2.3 U2.4 U2.6 U2.21 U2.22 U2.23 U2.27 U2.28 U2.36 U2.42 U2.43 U2.45 U2.46 U2.47 U2.48 U2.49 U2.52 U2.53 U2.54 U2.55 U2.77 U2.78 U2.79 U2.80 U3.9 U4.1 U5.7 U5.10 U5.11 U5.14 U7.7 U7.8 U7.9 U7.10 U7.14 U7.15 U7.16 U7.17

## Polygon pours and split planes (outlines as drawn)
GND on L1 "NONET_L-01_P-001" (solid, remove dead copper, pour order 85): -0.031,58.204 76,58.204 76,-0.6 -0.654,-0.6
+VBUS on L1 "NONET_L01_P-001" (solid, remove dead copper, pour order 84): 52.833,6.321 51.679,6.321 50.9,7.1 50.4,7.1 50.4,5.9 50.517,5.783 52.833,5.783
+3V3 on L1 "L1-+3V3 1" (solid, remove dead copper, pour order 82): 33.612,5.865 34.524,5.865 36.61,3.78 ccw(c37.454,4.625) 37.454,3.43 51.385,3.43 51.611,3.204 51.611,1.137 53.8,1.137 53.8,3 54.1,3.3 56.827,3.3 57.718,4.191 57.722,4.191 57.722,8.285 ccw(c56.838,8.286) 57.463,8.911 53.059,13.315 cw(c53.985,14.241) 52.675,14.241 52.675,32.394 ccw(c52.237,32.394) 52.237,32.832 49.945,32.832 ccw(c49.944,32.378) 49.491,32.378 49.491,30.741 51.503,30.741 cw(c51.503,30.513) 51.731,30.512 51.731,23.458 cw(c51.475,23.458) 51.475,23.202 49.5,23.202 ccw(c49.5,22.823) 49.121,22.823 49.121,22.123 cw(c48.995,22.123) 48.995,21.997 48.017,21.997 ccw(c48.017,21.743) 47.763,21.743 47.763,20.946 ccw(c48.053,20.946) 48.053,20.655 51.318,20.655 cw(c51.318,20.505) 51.468,20.505 51.468,12.706 ccw(c52.23,12.706) 51.691,12.168 55.411,8.448 cw(c54.716,7.751) 55.7,7.751 55.7,5.6 54.797,4.697 39.524,4.697 cw(c39.524,5.263) 38.958,5.263 38.958,7.801 33.612,7.801
+VBUS on L1 "NONET_L-01_P-001" (solid, remove dead copper, pour order 38): 12.805,7.497 12.805,6.69 ccw(c13.146,6.69) 13.146,6.349 18.783,6.349 cw(c18.783,5.885) 19.246,5.885 19.246,3.838 ccw(c19.841,3.838) 19.841,3.243 24.292,3.243 ccw(c24.292,3.977) 25.026,3.977 25.026,6.084 cw(c25.627,6.084) 25.627,6.685 29.559,6.685 29.559,5.174 ccw(c30.295,5.174) 30.295,4.438 31.336,4.438 cw(c31.336,3.854) 31.749,4.267 34.938,1.078 ccw(c36.401,2.541) 36.401,0.472 51.072,0.472 51.439,0.839 51.439,3.113 49.558,3.113 49.558,1.859 37.751,1.859 cw(c37.751,3.693) 36.454,2.396 32.557,6.293 32.557,7.869 ccw(c32.221,7.869) 32.221,8.205 24.804,8.205 ccw(c24.803,6.544) 23.142,6.544 23.142,5.07 cw(c22.789,5.069) 22.789,4.717 20.636,4.717 cw(c20.636,5.072) 20.281,5.072 20.281,7.149 ccw(c19.575,7.149) 19.575,7.855 13.163,7.855 ccw(c13.163,7.497)
+VREF on L1 "L1-+VREF" (solid, pour order 40): 54.317,30.121 57.117,30.121 57.117,30.594 55.328,30.594 55.328,30.794 57.114,30.794 57.114,31.247 57.113,31.247 57.113,32.926 54.379,32.914 ccw(c54.38,32.658) 54.124,32.658 54.124,31.247 54.12,30.318 ccw(c54.317,30.318)
+VREF on L1 "L1-+VREF 1" (solid, remove dead copper, pour order 45): 54.479,20.253 57.008,20.253 57.008,20.706 54.983,20.706 54.983,20.906 57.005,20.906 57.005,21.354 57.009,21.354 57.009,23.039 54.404,23.027 ccw(c54.405,22.754) 54.131,22.754 54.131,21.354 54.123,20.613 ccw(c54.479,20.609)
+1V1 on L1 "NONET_L-01_P-001" (solid, remove dead copper, pour order 46): 25.045,18.733 29.378,18.733 cw(c29.378,18.354) 29.758,18.354 29.758,16.494 cw(c29.308,16.494) 29.308,16.044 25.005,16.044 cw(c25.005,16.411) 24.639,16.413 24.651,18.342 cw(c25.045,18.339)
+3V3 on L1 "NONET_L-01_P-001" (solid, remove dead copper, pour order 48): 40.906,17.063 42.687,17.063 cw(c42.687,16.861) 42.89,16.86 42.89,12.822 cw(c42.703,12.822) 42.703,12.636 41.85,12.636 ccw(c41.85,12.244) 41.572,12.521 39.373,10.321 ccw(c40.365,9.33) 38.962,9.33 38.962,6.786 33.431,6.786 33.431,9.901 cw(c34.061,9.901) 33.615,10.346 34.86,11.591 cw(c35.201,11.25) 35.201,11.732 38.751,11.732 ccw(c38.751,12.115) 39.022,11.844 39.486,12.309 ccw(c39.214,12.582) 39.599,12.582 39.599,15.015 cw(c39.638,15.015) 39.638,15.054 40.598,15.054 ccw(c40.598,15.179) 40.723,15.179 40.723,16.88 cw(c40.906,16.88)
+3V3 on L1 "NONET_L-01_P-001" (solid, remove dead copper, pour order 49): 10.653,11.022 25.251,11.022 cw(c25.251,9.638) 26.229,10.616 27.735,9.111 ccw(c28.882,10.258) 28.882,8.636 33.344,8.636 33.344,6.784 36.559,6.784 ccw(c36.559,7.013) 36.788,7.013 36.788,10.32 30.212,10.32 cw(c30.212,11.952) 29.059,10.798 27.777,12.08 ccw(c26.893,11.196) 26.892,12.446 21.811,12.446 cw(c21.811,13.024) 21.234,13.024 21.234,17.189 ccw(c21.05,17.189) 21.05,17.373 20.271,17.373 ccw(c20.271,17.159) 20.057,17.159 20.057,13.06 cw(c19.444,13.06) 19.444,12.446 10.597,12.446 ccw(c10.597,12.213) 10.363,12.212 10.367,11.307 ccw(c10.653,11.308)
+3V3 on L1 "L1-+3V3" (solid, remove dead copper, pour order 70): 20.035,17.148 21.535,17.148 ccw(c21.535,17.726) 21.944,17.317 26.11,21.483 cw(c26.325,21.268) 26.325,21.572 27.991,21.573 ccw(c27.991,21.736) 28.154,21.736 28.154,21.872 cw(c28.26,21.872) 28.26,21.977 30.359,21.977 35.829,21.977 ccw(c35.829,22.3) 36.152,22.3 36.152,29.356 ccw(c35.709,29.356) 35.709,29.798 29.582,29.798 ccw(c29.582,29.186) 28.97,29.186 28.97,24.449 cw(c27.363,24.449) 28.52,23.334 27.772,22.558 25.111,22.558 ccw(c25.111,22.156) 24.71,22.156 24.71,21.427 cw(c24.492,21.427) 24.492,21.209 24.245,21.209 ccw(c24.244,20.761) 23.927,21.077 22.912,20.062 cw(c22.465,20.509) 22.465,19.877 20.475,19.877 ccw(c20.475,19.437) 20.035,19.437
+3V3 on L1 "NONET_L-01_P-001" (solid, remove dead copper, pour order 75): 9.787,40.268 11.502,40.268 ccw(c11.502,40.426) 11.659,40.426 11.659,42.264 cw(c11.752,42.264) 11.752,42.357 16.148,42.357 cw(c16.148,42.115) 16.391,42.115 16.391,33.151 ccw(c17.23,33.151) 17.23,32.311 19.37,32.311 ccw(c19.37,32.538) 19.597,32.538 19.597,33.339 ccw(c19.4,33.339) 19.4,33.536 18.389,33.536 cw(c18.389,33.795) 18.13,33.795 18.13,39.401 cw(c18.446,39.401) 18.446,39.717 19.456,39.717 ccw(c19.456,40.036) 19.774,40.036 19.774,43.091 ccw(c19.415,43.091) 19.415,43.45 10.399,43.45 ccw(c10.399,42.839) 9.787,42.839
+VBUS on L1 "NONET_L-01_P-001" (solid, remove dead copper, pour order 78): 15.205,38.867 13.986,38.867 cw(c13.986,39.219) 13.634,39.219 13.634,39.855 cw(c13.998,39.855) 13.998,40.22 15.116,40.22 cw(c15.116,39.84) 15.497,39.84 15.497,39.158 cw(c15.205,39.158)
+3V3 on L1 "NONET_L-01_P-001" (solid, pour order 80): 31.743,21.668 31.743,19.512 31.123,19.512 31.123,21.668 31.343,21.668 31.343,20.062 31.523,20.062 31.523,21.668 31.633,21.668
GND on L3 "NONET_L-01_P-001" (solid, remove dead copper, pour order 88): 4.064,54.779 77.7,54.779 77.7,-0.044 4.234,-0.044 cw(c4.234,4.341) -0.151,4.349 -0.071,50.651 cw(c4.064,50.644)
+VREF on L3 "L3-+VREF" (solid, remove dead copper, pour order 35): 53.971,1.379 56.979,1.379 57.4,1.8 57.4,3.6 55.753,5.247 55.753,31.329 ccw(c54.93,31.329) 54.93,32.152 54.513,32.152 ccw(c54.513,31.369) 53.729,31.374 53.544,1.809 ccw(c53.987,1.806) 53.544,1.806
+VBUS on L3 "NONET_L01_P-001" (solid, remove dead copper, pour order 43): 49.964,2.955 49.964,7.26 51.301,7.26 51.301,2.955
+VBUS on L3 "NONET_L-01_P-001" (solid, remove dead copper, pour order 55): 14.819,40.049 15.805,40.049 cw(c15.805,39.624) 16.231,39.623 16.231,12.79 ccw(c18.051,12.79) 16.764,11.503 19.853,8.414 cw(c18.651,7.212) 20.351,7.212 20.351,4.459 19.243,4.459 19.243,6.488 14.987,10.744 cw(c16.398,12.155) 14.403,12.155 14.403,39.632 cw(c14.819,39.632)
+1V1 on L3 "L3-+1V1" (solid, remove dead copper, pour order 69): 28.02,17.546 28.891,17.546 ccw(c28.891,18.222) 29.369,17.744 36.581,24.956 ccw(c36.182,25.356) 36.747,25.356 36.747,26.158 ccw(c36.323,26.158) 36.322,26.582 35.994,26.582 ccw(c35.994,26.112) 35.523,26.112 35.523,25.794 cw(c34.996,25.794) 35.369,25.421 31.245,21.298 cw(c30.26,22.283) 30.26,20.89 28.828,20.89 cw(c28.828,21.338) 28.38,21.338 28.38,24.791 cw(c28.66,24.791) 28.66,25.071 29.071,25.071 ccw(c29.071,25.538) 29.538,25.538 29.538,28.857 cw(c30.145,28.857) 30.145,29.464 31.95,29.464 ccw(c31.95,29.809) 32.294,29.809 32.294,30.284 ccw(c31.964,30.284) 31.963,30.615 29.994,30.615 ccw(c29.993,30.578) 29.993,30.615 28.143,30.614 ccw(c28.143,29.801) 27.33,29.801 27.33,17.918 ccw(c27.702,17.918) 27.386,17.722 27.386,17.663 27.431,17.663 ccw(c27.702,17.919) 27.702,17.546 28.02,17.546 ccw(c28.02,17.559)
+3V3 on L3 "NONET_L-01_P-001" (solid, remove dead copper, pour order 86): 22.149,19.118 22.149,17.989 cw(c21.751,17.989) 21.751,17.591 17.813,17.591 cw(c17.813,18.8) 16.603,18.8 16.603,33.491 cw(c17.092,33.491) 17.092,33.98 17.875,33.98 cw(c17.875,33.5) 18.355,33.5 18.355,19.982 ccw(c18.77,19.982) 18.77,19.566 21.7,19.566 cw(c21.7,19.118)
GND on L2 "NONET_L-01_P-001" (solid, remove dead copper, pour order 68): 77.8,54.982 77.8,-0.111 4.629,-0.111 cw(c4.629,4.224) 0.293,4.224 0.294,50.688 cw(c4.587,50.688) 4.587,54.982
GND on L4 "NONET_L-01_P-001" (solid, remove dead copper, pour order 3): 3.34,54.94 77.7,54.94 77.7,-0.056 4.254,-0.056 cw(c4.254,4.224) -0.026,4.224 -0.026,51.574 cw(c3.34,51.574)

## Keep-outs
L3:
  region: 22.845,4.257 21.175,4.257 21.175,7.69 25.058,11.573 cw(c26.854,9.777) 26.854,12.316 31.218,12.317 cw(c31.218,11.959) 31.576,11.959 31.576,10.544 cw(c31.011,10.544) 31.011,9.978 26.971,9.978 ccw(c26.97,8.656) 26.067,9.621 22.845,6.713
Keep-Out Layer:
  lines w0.5: -0.026,4.224 ccw(c4.254,4.224) 4.254,-0.056 71.644,-0.056 ccw(c71.644,4.3) 76,4.3 76,50.6 ccw(c71.66,50.6) 71.66,54.94 4.226,54.94 ccw(c4.226,50.688) -0.026,50.688 -0.026,4.224
  lines w0.6: 6.3,28.745 ccw(c3.9,28.701) 6.3,28.7 ; 7.6,7.8 cw(c5.2,7.801) 7.6,7.845 ; 70.8,4.3 cw(c68.4,4.301) 70.8,4.345 ; 73.1,48.8 cw(c70.8,48.801) 73.1,48.843

## Other copper
L1:
  pour cut-out: 30.01,23.968 34.47,23.968 34.47,28.359 30.01,28.359

## Silkscreen, mask and mechanical layers (free items; w line width, h text height)
Top Overlay:
  the board outline again, w0.4
Bottom Overlay:
  drawing of 121 lines, arcs and shapes, not listed
  text "TX2" at 50.481,51.87 h1.2
  text "RX2" at 56.147,51.87 h1.2
  text "RX1" at 36.018,51.611 h1.2
  text "TX1" at 42.184,51.611 h1.2
  text "A" at 23.634,49.107 h1.2
  text "B" at 27.027,49.107 h1.2
  text "CANH" at 10.619,48.925 h1.2
  text "CANL" at 16.701,48.925 h1.2
  text "GND" at 60.284,48.157 h1.2
  text "GND" at 39.318,47.15 h1.2
  text "GND" at 53.338,46.963 h1.2
  text "RX2_232" at 46.33,45.272 h1.2
  text "SWCLK" at 53.944,44.051 h1.2
  text "RX_CAN" at 12.112,43.675 h1.2
  text "RX1_232" at 40.184,41.911 h1.2
  text "GND" at 53.944,41.354 h1.2
  text "SWDIO" at 53.944,38.657 h1.2
  text "CH0" at 75.046,38.454 h1
  text "CHANNEL TO GPIO TABLE" at 57.6,36.4 h0.9
  text "CH2" at 75.046,36.054 h1
  text "CH1" at 66.946,34.754 h1
  text "RUN" at 28.718,33.697 h1.2
  text "RX_485" at 21.705,32.745 h1.2
  text "CH4" at 75.046,30.354 h1
  text "CH3" at 66.946,29.654 h1
  text "CH5" at 75.046,28.154 h1
  text "CH6" at 66.746,25.254 h1
  text "ADC3" at 12.379,23.309 h1.2
  text "CH7" at 66.646,23.054 h1
  text "CH8" at 75.046,22.054 h1
  text "ADC2" at 12.284,20.637 h1.2
  text "ADC1" at 12.157,18.125 h1.2
  text "CH9" at 66.646,16.954 h1
  text "+1V1" at 25.916,16.296 h1.2
  text "CH10" at 75.346,15.754 h1
  text "A_REF" at 13.079,15.595 h1.2
  text "CH00 ----  GPIO20 CH01 ---- GPIO19  CH02 ---- GPIO18 CH03 ---- GPIO17 CH04 ---- GPIO16 CH05 ---- GPIO15 CH06 ---- GPIO14 CH07 ---- GPIO13 CH08 ---- GPIO12 CH09 ---- GPIO11 CH10 ---- GPIO10 CH11 ---- GPIO09 CH10 ---- GPIO08" at 58.073,15.287 h2
  text "CH11" at 75.246,13.454 h1
  text "GND" at 8.496,13.04 h1.2
  text "QSPI_SS" at 53.902,12.138 h1.2
  text "GND" at 67.021,10.004 h1
  text "NC" at 49.97,3.676 h1.2 r270
  text "+VBUS" at 52.064,3.676 h1.2 r270
  text "VREF" at 54.157,3.676 h1.2 r270
  text "+3V3" at 56.25,3.676 h1.2 r270
  text "+2V5" at 58.343,3.676 h1.2 r270
  text "+1V65" at 60.436,3.676 h1.2 r270
Top Solder:
  drawing of 15 lines, arcs and shapes, not listed
Manufacturing Notes:
  drawing of 304 lines, arcs and shapes, not listed
  text "MANUFACTURING NOTES" at 56.032,225.551 h3
  text "BOARD INFO" at 106.032,218.635 h1.5
  text "FILES" at 57.032,218.027 h1.5
  text "GTO - Top Overlay" at 57.032,214.548 h1.5
  text "Minimum Track: 0.15mm (590.5512mil)" at 106.032,213.635 h1.5
  text "GTP - Top Paste" at 57.032,211.635 h1.5
  text "Minimum Clearance: 0.16mm (629.9213mil)" at 106.032,209.635 h1.5
  text "GTS - Top Solder" at 57.032,208.635 h1.5
  text "GTL - L1 (Positive)" at 57.032,205.635 h1.5
  text "Minimum Through Hole VIA: 0.6mm (23.62mil) (pad) / 0.3mm (11.8mil) (Drill)" at 106.032,205.551 h1.5
  text "G1  - L2 (Positive)" at 57.032,202.635 h1.5
  text "Drilling: L1-L4" at 106.032,201.635 h1.5
  text "G2  - L3 (Positive)" at 57.032,199.635 h1.5
  text "GBL - L4 (Positive)" at 57.032,196.635 h1.5
  text "GBS - Bottom Solder" at 57.032,193.635 h1.5
  text "GBP - Bottom Paste" at 57.032,190.635 h1.5
  text "GBO - Bottom Overlay" at 57.032,187.551 h1.5
  text "GM3 - Manufacturing Notes" at 57.032,184.551 h1.5
  text "GM28 - Board Outline" at 57.032,181.551 h1.5
  text "STACKUP BOARD" at 79.486,167.471 h2.5
  text "Layer" at 82.063,161.202 h1.52
  text "Name" at 92.475,161.202 h1.52
  text "Material" at 116.091,161.202 h1.52
  text "Thickness" at 137.929,161.202 h1.52
  text "Constant" at 154.434,161.202 h1.52
  text "Board Layer Stack" at 168.909,161.202 h1.52
  text "Top Overlay" at 92.475,158.154 h1.52
  text "Top Solder" at 92.475,155.106 h1.52
  text "Solder Resist" at 116.091,155.106 h1.52
  text "0.018mm" at 137.929,155.106 h1.52
  text "3.5" at 154.434,155.106 h1.52
  text "1" at 82.063,152.058 h1.52
  text "L1" at 92.475,152.058 h1.52
  text "CF-004" at 116.091,152.058 h1.52
  text "0.018mm" at 137.929,152.058 h1.52
  text "Dielectric 2" at 92.475,149.01 h1.52
  text "PP-006" at 116.091,149.01 h1.52
  text "0.196mm" at 137.929,149.01 h1.52
  text "4.74" at 154.434,149.01 h1.52
  text "2" at 82.063,145.962 h1.52
  text "L2" at 92.475,145.962 h1.52
  text "CF-004" at 116.091,145.962 h1.52
  text "0.035mm" at 137.929,145.962 h1.52
  text "Dielectric 1" at 92.475,142.914 h1.52
  text "FR-4" at 116.091,142.914 h1.52
  text "1.030mm" at 137.929,142.914 h1.52
  text "4.6" at 154.434,142.914 h1.52
  text "3" at 82.063,139.866 h1.52
  text "L3" at 92.475,139.866 h1.52
  text "CF-004" at 116.091,139.866 h1.52
  text "0.035mm" at 137.929,139.866 h1.52
  text "Dielectric 3" at 92.475,136.818 h1.52
  text "PP-006" at 116.091,136.818 h1.52
  text "0.196mm" at 137.929,136.818 h1.52
  text "4.74" at 154.434,136.818 h1.52
  text "4" at 82.063,133.77 h1.52
  text "L4" at 92.475,133.77 h1.52
  text "CF-004" at 116.091,133.77 h1.52
  text "0.018mm" at 137.929,133.77 h1.52
  text "Bottom Solder" at 92.475,130.722 h1.52
  text "Solder Resist" at 116.091,130.722 h1.52
  text "0.018mm" at 137.929,130.722 h1.52
  text "3.5" at 154.434,130.722 h1.52
  text "Bottom Overlay" at 92.475,127.674 h1.52
  text "'.TitleProject'" at 82.23,118.428 h1.5
  text "'.VersionRevision'" at 116.23,118.428 h1.5
  text "'.Company'" at 82.644,114.594 h1.5
  text "'.VariantName'" at 82.066,110.721 h1.5
Drill Drawing:
  drawing of 179 lines, arcs and shapes, not listed
  text "Symbol" at 101.435,94.521 h1.83
  text "Count" at 114.284,94.521 h1.83
  text "Hole Size" at 129.52,94.521 h1.83
  text "Plated" at 158.722,94.521 h1.83
  text "Hole Type" at 171.571,94.521 h1.83
  text "Drill Layer Pair" at 190.21,94.521 h1.83
  text "Via/Pad" at 220.427,94.521 h1.83
  text "Pad Shape" at 235.409,94.521 h1.83
  text "Template" at 254.352,94.521 h1.83
  text "Description" at 282.284,94.521 h1.83
  text "Hole Tolerance (+)" at 303.97,94.521 h1.83
  text "Hole Tolerance (-)" at 337.843,94.521 h1.83
  text "Hole Length" at 371.717,94.521 h1.83
  text "Routed Path Length" at 399.395,94.521 h1.83
  text "DRILL TABLE" at 99.028,93.646 h2.5
  text "2" at 114.284,90.711 h1.52
  text "23.62mil (0.600mm)" at 129.52,90.711 h1.52
  text "PTH" at 158.722,90.711 h1.52
  text "Slot" at 171.571,90.711 h1.52
  text "L1 - L4" at 190.21,90.711 h1.52
  text "Pad" at 220.427,90.711 h1.52
  text "Rounded" at 235.409,90.711 h1.52
  text "r170_90h60_140r45" at 254.352,90.711 h1.52
  text "55.12mil (1.400mm)" at 371.717,90.711 h1.52
  text "31.50mil (0.800mm)" at 399.395,90.711 h1.52
  text "2" at 114.284,86.901 h1.52
  text "23.62mil (0.600mm)" at 129.52,86.901 h1.52
  text "PTH" at 158.722,86.901 h1.52
  text "Slot" at 171.571,86.901 h1.52
  text "L1 - L4" at 190.21,86.901 h1.52
  text "Pad" at 220.427,86.901 h1.52
  text "Rounded" at 235.409,86.901 h1.52
  text "r240_90h60_210r45" at 254.352,86.901 h1.52
  text "82.68mil (2.100mm)" at 371.717,86.901 h1.52
  text "59.06mil (1.500mm)" at 399.395,86.901 h1.52
  text "2" at 114.284,83.091 h1.52
  text "49.21mil (1.250mm)" at 129.52,83.091 h1.52
  text "PTH" at 158.722,83.091 h1.52
  text "Round" at 171.571,83.091 h1.52
  text "L1 - L4" at 190.21,83.091 h1.52
  text "Pad" at 220.427,83.091 h1.52
  text "Rounded" at 235.409,83.091 h1.52
  text "(Mixed)" at 254.352,83.091 h1.52
  text "-" at 371.717,83.091 h1.52
  text "-" at 399.395,83.091 h1.52
  text "2" at 114.284,79.281 h1.52
  text "57.48mil (1.460mm)" at 129.52,79.281 h1.52
  text "PTH" at 158.722,79.281 h1.52
  text "Round" at 171.571,79.281 h1.52
  text "L1 - L4" at 190.21,79.281 h1.52
  text "Pad" at 220.427,79.281 h1.52
  text "Rounded" at 235.409,79.281 h1.52
  text "c219h146" at 254.352,79.281 h1.52
  text "-" at 371.717,79.281 h1.52
  text "-" at 399.395,79.281 h1.52
  text "2" at 114.284,75.471 h1.52
  text "78.74mil (2.000mm)" at 129.52,75.471 h1.52
  text "PTH" at 158.722,75.471 h1.52
  text "Round" at 171.571,75.471 h1.52
  text "L1 - L4" at 190.21,75.471 h1.52
  text "Via" at 220.427,75.471 h1.52
  text "Rounded" at 235.409,75.471 h1.52
  text "v300h200m220" at 254.352,75.471 h1.52
  text "-" at 371.717,75.471 h1.52
  text "-" at 399.395,75.471 h1.52
  text "4" at 114.284,71.661 h1.52
  text "39.37mil (1.000mm)" at 129.52,71.661 h1.52
  text "PTH" at 158.722,71.661 h1.52
  text "Round" at 171.571,71.661 h1.52
  text "L1 - L4" at 190.21,71.661 h1.52
  text "Pad" at 220.427,71.661 h1.52
  text "Rounded" at 235.409,71.661 h1.52
  text "c150h100" at 254.352,71.661 h1.52
  text "-" at 371.717,71.661 h1.52
  text "-" at 399.395,71.661 h1.52
  text "4" at 114.284,67.851 h1.52
  text "137.79mil (3.500mm)" at 129.52,67.851 h1.52
  text "PTH" at 158.722,67.851 h1.52
  text "Round" at 171.571,67.851 h1.52
  text "L1 - L4" at 190.21,67.851 h1.52
  text "Pad" at 220.427,67.851 h1.52
  text "Rounded" at 235.409,67.851 h1.52
  text "c0h350" at 254.352,67.851 h1.52
  text "-" at 371.717,67.851 h1.52
  text "-" at 399.395,67.851 h1.52
  text "6" at 114.284,64.041 h1.52
  text "30.71mil (0.780mm)" at 129.52,64.041 h1.52
  text "PTH" at 158.722,64.041 h1.52
  text "Round" at 171.571,64.041 h1.52
  text "L1 - L4" at 190.21,64.041 h1.52
  text "Pad" at 220.427,64.041 h1.52
  text "(Mixed)" at 235.409,64.041 h1.52
  text "(Mixed)" at 254.352,64.041 h1.52
  text "-" at 371.717,64.041 h1.52
  text "-" at 399.395,64.041 h1.52
  text "6" at 114.284,60.231 h1.52
  text "31.50mil (0.800mm)" at 129.52,60.231 h1.52
  text "PTH" at 158.722,60.231 h1.52
  text "Round" at 171.571,60.231 h1.52
  text "L1 - L4" at 190.21,60.231 h1.52
  text "Pad" at 220.427,60.231 h1.52
  text "Rounded" at 235.409,60.231 h1.52
  text "c130h80" at 254.352,60.231 h1.52
  text "-" at 371.717,60.231 h1.52
  text "-" at 399.395,60.231 h1.52
  text "8" at 114.284,56.421 h1.52
  text "40.16mil (1.020mm)" at 129.52,56.421 h1.52
  text "PTH" at 158.722,56.421 h1.52
  text "Round" at 171.571,56.421 h1.52
  text "L1 - L4" at 190.21,56.421 h1.52
  text "Pad" at 220.427,56.421 h1.52
  text "(Mixed)" at 235.409,56.421 h1.52
  text "(Mixed)" at 254.352,56.421 h1.52
  text "-" at 371.717,56.421 h1.52
  text "-" at 399.395,56.421 h1.52
  text "9" at 114.284,52.611 h1.52
  text "43.31mil (1.100mm)" at 129.52,52.611 h1.52
  text "PTH" at 158.722,52.611 h1.52
  text "Round" at 171.571,52.611 h1.52
  text "L1 - L4" at 190.21,52.611 h1.52
  text "Pad" at 220.427,52.611 h1.52
  text "(Mixed)" at 235.409,52.611 h1.52
  text "(Mixed)" at 254.352,52.611 h1.52
  text "-" at 371.717,52.611 h1.52
  text "-" at 399.395,52.611 h1.52
  text "16" at 114.284,48.801 h1.52
  text "15.75mil (0.400mm)" at 129.52,48.801 h1.52
  text "PTH" at 158.722,48.801 h1.52
  text "Round" at 171.571,48.801 h1.52
  text "L1 - L4" at 190.21,48.801 h1.52
  text "Pad" at 220.427,48.801 h1.52
  text "Rounded" at 235.409,48.801 h1.52
  text "(Mixed)" at 254.352,48.801 h1.52
  text "-" at 371.717,48.801 h1.52
  text "-" at 399.395,48.801 h1.52
  text "20" at 114.284,44.991 h1.52
  text "45.28mil (1.150mm)" at 129.52,44.991 h1.52
  text "PTH" at 158.722,44.991 h1.52
  text "Round" at 171.571,44.991 h1.52
  text "L1 - L4" at 190.21,44.991 h1.52
  text "Pad" at 220.427,44.991 h1.52
  text "(Mixed)" at 235.409,44.991 h1.52
  text "(Mixed)" at 254.352,44.991 h1.52
  text "-" at 371.717,44.991 h1.52
  text "-" at 399.395,44.991 h1.52
  text "761" at 114.284,41.181 h1.52
  text "11.81mil (0.300mm)" at 129.52,41.181 h1.52
  text "PTH" at 158.722,41.181 h1.52
  text "Round" at 171.571,41.181 h1.52
  text "L1 - L4" at 190.21,41.181 h1.52
  text "Via" at 220.427,41.181 h1.52
  text "Rounded" at 235.409,41.181 h1.52
  text "v60h30m0mx0" at 254.352,41.181 h1.52
  text "-" at 371.717,41.181 h1.52
  text "-" at 399.395,41.181 h1.52
  text "844 Total" at 114.284,37.371 h1.52
  text "Slot definitions :" at 101.435,33.689 h1.52
  text "Routed Path Length" at 127.666,33.689 h1.52
  text "= Calculated from tool start centre position to tool end centre position." at 155.673,33.689 h1.52
  text "Hole Length" at 127.666,31.15 h1.52
  text "= Routed Path Length + Tool Size = Slot length as defined in the PCB layout" at 145.263,31.15 h1.52
Board Outline:
  the board outline again, w0.1